# Altium PCB controller.PcbDoc (part 2 of 2)
Units mm, origin at the board's own origin, x right, y up, seen from the top; angles counter-clockwise.
Board outline 61.75 x 57 mm, 2 copper layers (Top Layer, Bottom Layer), stack 1.57 mm thick; 231 components, 171 nets, 622 pads, 230 vias.
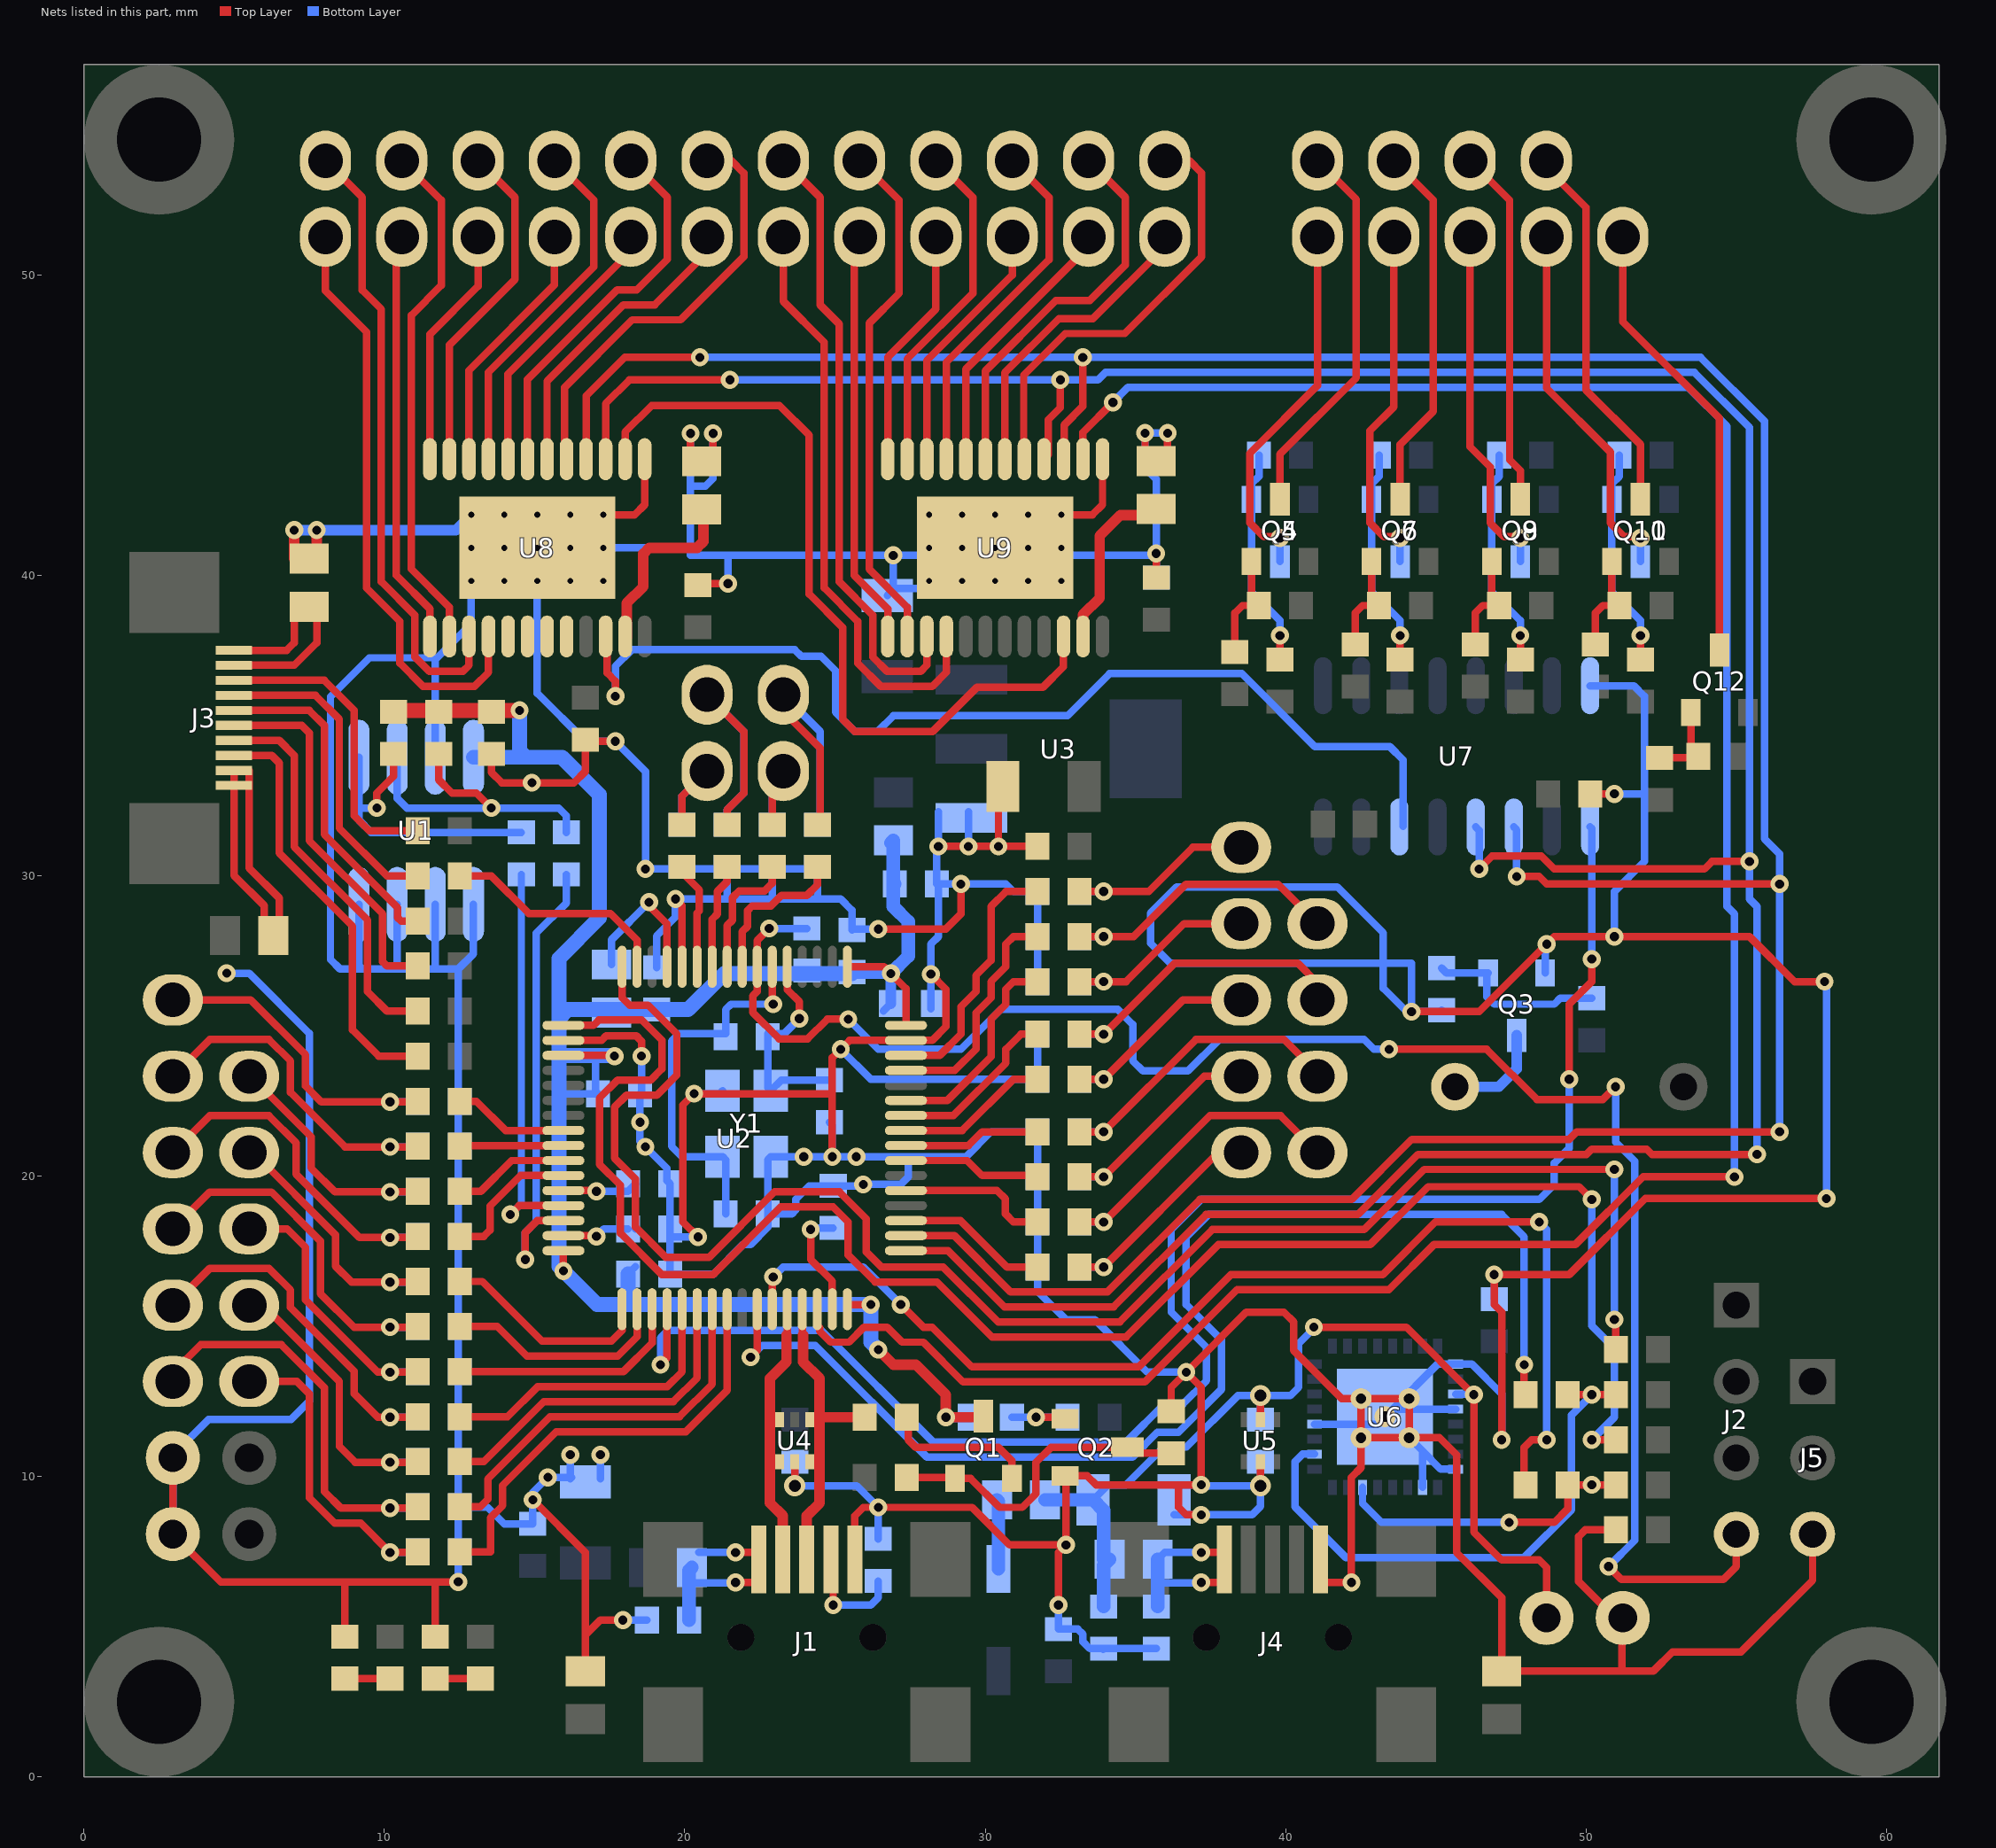
[diagram p2: the nets of this part, all layers, seen from the top]

## Via types
v1: diameter 0.6, hole 0.3, Top Layer to Bottom Layer, 196 vias
v2: diameter 0.5, hole 0.2, Top Layer to Bottom Layer, 30 vias
v3: diameter 0.7, hole 0.4, Top Layer to Bottom Layer, 4 vias

## Nets (pads, with @x,y where several pads share a name; then routed paths per layer and width w, separated by ;. In a path a pad name is that pad's centre, name@x,y a point inside that pad or via, vN(x,y) a via of type N, cw(c..) or ccw(c..) an arc to the next point about the centre after c; other vN are vias at no path point) (continued)
GND: C1.2 C2.1 C3.2 C4.2 C5.1 C6.1 C7.2 C8.2 C9.2 C10.2 C11.1 C12.2 C13.1 C14.2 C15.1 C16.2 C17.2 C18.2 C19.2 C20.2 C21.2 C22.2 C23.2 C24.2 C25.2 C26.2 C27.2 C28.2 C29.2 C30.2 C31.2 C32.2 C33.2 C34.2 C35.2 C36.2 C37.2 C38.2 C39.2 C40.2 C41.2 C42.2 C43.1 C44.2 C45.2 C46.2 C47.1 C48.2 C49.1 C50.2 C51.1 C52.1 J1.5 J4.5 J5.3 L4.1 L7.1 L9.1 Q2.2 Q3.2 R3.1 R5.2 R15.1 R16.1 R44.2 R46.2 R48.2 R74.1 R75.1 R76.1 Tp1.1 Tp5.1 Tp6.1 U1.1 U1.2 U1.3 U1.4 U1.7 U2.12 U2.18 U2.63 U3.1 U4.2 U5.2 U6.4 U6.17 U6.20 U6.24 U6.26 U6.GND_PAD U7.8 U8.1 U8.25 U9.1 U9.25 Y1.2 Y1.4 | length 492.9
  Top Layer w0.25: Tp5.1@3.01,10.62 Tp5.1@2.96,10.62 Tp6.1@2.96,8.08 4.55,6.49 8.69,6.49 ; R15.1@8.69,4.67 8.69,6.49 ; R16.1@11.69,4.67 11.69,6.49 ; v1(12.46,6.49) 11.69,6.49 ; C2.1@13.56,34.05 13.56,33.44 13.91,33.09 v1(14.91,33.09) 16.31,33.09 16.69,33.47 R74.1@16.69,34.52 16.74,34.47 v1(17.69,34.47) ; v1(14.94,9.22) 16.69,7.47 16.69,4.72 ; U2.18@15.96,24.515 17.23,24.515 17.38,24.665 18.385,24.665 18.56,24.49 v1(18.56,23.99) ; L4.1@16.69,3.52 16.69,4.72 ; v2(17.29,42.01) 18.33,42.01 18.665,42.345 U8.1@18.665,43.86 ; v1(17.94,5.22) 17.19,5.22 16.69,4.72 ; v1(19.69,29.22) 19.91,29 U2.12@19.91,26.965 ; R75.1@20.19,43.56 v1(20.19,44.72) ; C51.1@20.28,39.72 v1(21.44,39.72) ; v1(20.44,17.97) 19.94,18.47 19.94,22.37 v1(20.31,22.74) 24.89,22.74 24.91,22.72 ; R75.1@20.94,43.56 v1(20.94,44.72) ; v3(23.66,9.69) U4.2@23.66,10.49 ; v1(24.91,20.64) 24.91,22.72 ; J1.5@25.66,7.24 25.66,8.69 25.94,8.97 v1(26.44,8.97) 29.56,8.97 30.81,7.72 v1(32.69,7.72) ; v1(26.44,28.22) 28.69,28.22 29.19,28.72 v1(29.19,29.72) ; v1(28.19,26.72) 28.69,26.22 28.69,24.97 28.235,24.515 U2.63@27.36,24.515 25.485,24.515 v1(25.19,24.22) 24.91,23.94 24.91,22.72 ; v1(28.44,30.97) v1(29.44,30.97) v1(30.44,30.97) ; C14.2@30.59,32.97 30.44,32.82 v1(30.44,30.97) ; C15.1@31.74,30.97 v1(30.44,30.97) ; v1(32.44,5.72) 32.44,7.47 v1(32.69,7.72) ; v2(32.53,42.01) 33.57,42.01 33.905,42.345 U9.1@33.905,43.86 ; R76.1@35.32,43.57 v1(35.32,44.73) ; C52.1@35.69,39.91 v1(35.69,40.72) ; R76.1@36.07,43.57 v1(36.07,44.73) ; R44.2@36.19,12.17 36.19,12.97 v1(36.69,13.47) ; v1(37.19,8.72) 36.69,8.72 36.44,8.97 36.44,9.72 ; v3(39.16,9.69) U5.2@39.16,10.49 ; J4.5@41.16,7.24 41.16,6.47 v1(42.19,6.47) 42.19,9.97 42.51,10.29 U6.GND_PAD@42.51,11.29 ; v1(44.19,25.47) 46.44,25.47 v1(48.69,27.72) 48.94,27.97 v1(50.94,27.97) 55.44,27.97 56.94,26.47 v1(57.94,26.47) ; v1(47.19,11.22) 47.19,15.47 46.94,15.72 v1(46.94,16.72) 49.44,16.72 51.97,19.25 v1(58,19.25) ; C50.2@50.14,32.72 v1(50.94,32.72) ; Tp1.1@50.99,5.77 Tp1.1@51.19,5.57 ; R3.1@50.99,8.22 49.97,8.22 49.75,8 49.75,6.5 50.96,5.29 Tp1.1@51.19,5.29 ; Tp1.1@51.19,5.72 Tp1.1@51.19,5.57 ; Tp1.1@51.22,5.29 Tp1.1@51.19,5.29 ; Tp1.1@51.22,5.54 Tp1.1@51.19,5.57 ; J5.3@57.54,8.08 57.54,6.54 55.16,4.16 52.88,4.16 52.24,3.52 51.19,3.52 ; 8.69,6.49 11.69,6.49 ; v1(32.69,7.72) 32.69,9.982 Q2.2@32.652,10.02 33.39,10.02 33.69,9.72 36.44,9.72 ; 36.44,9.72 v1(37.19,9.72) 37.19,12.97 v1(36.69,13.47) ; v1(36.69,13.47) 38.69,15.47 39.94,15.47 40.265,15.145 40.265,14.19 41.865,12.59 U6.GND_PAD@42.51,12.59 ; U6.GND_PAD@42.51,11.29 U6.GND_PAD@42.51,12.59 ; U6.GND_PAD@42.51,11.29 U6.GND_PAD@44.11,11.29 ; U6.GND_PAD@42.51,12.59 U6.GND_PAD@44.11,12.59 U6.GND_PAD@44.11,11.29 ; U6.GND_PAD@44.11,11.29 45.12,11.29 45.69,10.72 45.69,7.47 47.19,5.97 L9.1@47.19,3.52 51.19,3.52 ; 51.19,3.52 Tp1.1@51.19,5.29 ; Tp1.1@51.19,5.29 Tp1.1@51.19,5.57
  Top Layer w0.35: L7.1@7,40.55 v1(7,41.5) ; L7.1@7.75,40.55 v1(7.75,41.5)
  Bottom Layer w0.25: Tp6.1@2.96,8.08 Tp5.1@2.96,10.62 2.96,10.71 4.145,11.895 6.895,11.895 7.5,12.5 7.5,24.75 5.5,26.75 v1(4.75,26.75) ; U1.4@9.155,29.04 9.155,26.995 9.26,26.89 ; U1.3@10.425,29.04 10.425,26.955 10.36,26.89 ; U1.2@11.695,29.04 11.695,26.955 11.76,26.89 ; U1.7@11.695,33.94 11.695,37.195 ; v1(12.46,6.49) C36.2@12.46,8.99 ; v2(12.89,42.01) v2(12.89,40.91) v2(12.89,39.81) 12.89,38.39 11.695,37.195 ; U1.1@12.965,29.04 12.965,27.395 12.46,26.89 ; v2@15.09,40.66 v2(15.09,39.81) 15.09,36.07 16.69,34.47 v1(17.69,34.47) 18.69,33.47 v1(18.69,30.22) C30.2@21.41,30.22 ; C40.2@16.19,9.92 C40.2@16.19,9.97 ; v1(16.19,10.72) C40.2@16.19,9.97 ; C40.2@16.24,9.97 C40.2@16.19,9.97 ; C40.2@17.19,9.92 v1(17.19,10.72) ; v2(17.29,40.91) 20.1,40.91 20.19,41 ; v1(17.94,5.22) C42.2@18.74,5.22 ; v1(18.56,23.99) 18.56,22.79 C8.2@18.51,22.74 v1(18.51,21.79) 18.51,21.15 v1(18.69,20.97) 19.406,20.254 19.406,19.844 R5.2@19.51,19.74 C6.1@19.51,18.24 C9.2@19.51,16.74 20.96,16.74 21.94,17.72 22.19,17.72 22.76,18.29 C3.2@22.76,18.74 ; C4.2@19.06,26.94 19.06,27.99 19.69,28.62 v1(19.69,29.22) 21.41,29.22 ; C6.1@19.64,17.97 v1(20.44,17.97) ; v1(20.19,44.72) 20.19,42.97 ; v1(20.31,22.74) 21.16,22.74 Y1.4@21.26,22.84 ; v1(20.94,44.72) 20.94,43.22 20.69,42.97 20.19,42.97 ; C30.2@21.41,30.29 C30.2@21.41,30.22 ; v1(21.44,39.72) 21.44,40.66 ; C29.2@22.91,30.29 C29.2@22.91,30.22 ; C43.1@23.66,10.49 v3(23.66,9.69) 25.72,9.69 v1(26.44,8.97) R46.2@26.44,7.92 ; C1.2@24.81,21.79 24.91,21.69 v1(24.91,20.64) ; v1(25.19,24.22) 26.19,23.22 C20.2@31.74,23.22 C21.2@31.74,24.72 ; v1@25.71,20.59 v1(25.71,20.64) ; v1(26.44,28.22) 25.59,28.22 C10.2@25.56,28.19 25.56,28.85 25.19,29.22 24.41,29.22 ; C12.2@26.74,39.32 C12.2@26.94,39.52 ; v2@28.13,39.56 26.98,39.56 C12.2@26.94,39.52 ; C7.2@28.19,25.56 v1(28.19,26.72) 28.19,27.72 28.44,27.97 28.44,29.67 C11.1@28.39,29.72 ; U3.1@28.44,32.13 v1(28.44,30.97) 28.39,30.92 C11.1@28.39,29.72 ; v1(29.44,30.97) U3.1@29.44,32.13 ; v1(30.44,30.97) U3.1@30.44,32.13 ; C22.2@31.74,26.47 C23.2@31.74,27.97 C24.2@31.74,29.47 30.94,29.47 30.69,29.72 v1(29.19,29.72) C11.1@28.39,29.72 ; v1(32.44,5.72) C47.1@32.44,4.92 33.08,4.92 33.25,4.75 33.25,4.5 33.48,4.27 C46.2@33.94,4.27 ; C46.2@33.92,4.25 C46.2@33.94,4.27 ; v1@35.5,40.66 v1(26.94,40.66) ; C45.2@35.69,4.27 C46.2@33.94,4.27 ; C13.1@35.69,39.92 v1@35.69,40.47 ; v1(35.69,40.72) 35.69,43.2 35.32,43.57 v1(35.32,44.73) v1(36.07,44.73) ; C44.2@36.29,8.72 v1(37.19,8.72) 38.88,8.72 39.16,9 C49.1@39.16,10.49 ; C44.2@36.29,9.72 v1(37.19,9.72) 37.22,9.69 v3(39.16,9.69) ; v1(36.69,13.47) 35.397,13.47 33.647,15.22 32.69,15.22 31.74,16.17 C38.2@31.74,16.97 C39.2@31.74,18.47 C18.2@31.74,19.97 C19.2@31.74,21.47 30.19,21.47 29.36,20.64 27.44,20.64 ; U6.4@40.96,11.74 43.06,11.74 U6.GND_PAD@43.31,11.99 U6.GND_PAD@43.56,12.24 ; v1@44,25.5 43.25,26.25 43.25,27.085 ; U6.GND_PAD@44.11,11.29 U6.GND_PAD@44.56,10.84 ; U6.26@44.56,9.64 U6.GND_PAD@44.56,10.84 ; R48.2@45.19,25.52 45.14,25.47 v1(44.19,25.47) 44.19,27.085 43.25,27.085 ; U6.24@45.66,10.24 45.16,10.24 U6.GND_PAD@44.56,10.84 ; U6.20@45.66,12.24 U6.GND_PAD@43.56,12.24 ; C48.2@46.94,15.92 v1(46.94,16.72) ; v1(47.19,11.22) 47.19,11.47 47.19,12.75 46.2,13.74 U6.17@45.66,13.74 45.06,13.74 U6.GND_PAD@43.56,12.24 ; Q3.2@48.64,26.758 48.64,27.67 v1(48.69,27.72) ; U7.8@50.135,36.32 51.59,36.32 51.94,35.97 51.94,32.72 ; v1(50.94,27.97) 50.94,29.47 51.94,30.47 51.94,32.72 ; v1(50.94,32.72) 51.94,32.72 ; v1(57.94,26.47) 58,26.41 v1(58,19.25) ; 9.26,26.89 8.52,26.89 8.205,27.205 8.205,35.955 9.5,37.25 11.64,37.25 11.695,37.195 ; 9.26,26.89 10.36,26.89 ; 10.36,26.89 11.76,26.89 ; 11.76,26.89 12.46,26.89 ; C36.2@12.46,8.99 12.46,11.99 12.46,14.99 12.46,20.99 12.46,26.89 ; C36.2@12.46,8.99 12.48,8.97 13.44,8.97 13.99,8.42 C41.2@14.94,8.42 ; C41.2@14.94,8.42 v1(14.94,9.22) ; C41.2@14.94,8.42 v1(14.94,9.22) ; v1(14.94,9.22) 14.94,9.47 v1(15.44,9.97) C40.2@16.19,9.97 ; 20.19,41 20.19,42.97 ; 20.19,41 20.19,40.66 21.44,40.66 ; 21.41,29.22 22.91,29.22 ; 21.41,29.22 C30.2@21.41,30.22 ; C30.2@21.41,30.22 C29.2@22.91,30.22 ; 21.44,40.66 v1(26.94,40.66) ; C3.2@22.76,18.74 23.56,18.74 23.69,18.87 23.69,19.22 24.14,19.67 C5.1@24.94,19.67 25.89,19.67 v1(25.94,19.72) 27.19,19.72 27.44,19.97 27.44,20.64 ; C3.2@22.76,18.74 22.76,20.54 Y1.2@22.86,20.64 v1(23.96,20.64) v1(24.91,20.64) ; 22.91,29.22 C29.2@22.91,30.22 ; 22.91,29.22 24.41,29.22 ; C29.2@22.91,30.22 24.34,30.22 C28.2@24.41,30.29 24.41,29.22 ; v1(24.91,20.64) v1(25.71,20.64) ; v1(25.71,20.64) 27.44,20.64 ; C12.2@26.94,39.52 v1(26.94,40.66) ; 43.25,27.085 43.25,28.092 41.717,29.625 36.375,29.625 35.5,28.75 35.5,27.75 36.165,27.085 43.25,27.085
  Bottom Layer w0.35: v1(7,41.5) v1(7.75,41.5) 12.38,41.5 v2(12.89,42.01)
  other v2: 13.99,39.81 16.19,39.81 17.29,39.81 28.13,39.81 29.23,39.81 30.33,39.81 31.43,39.81 32.53,39.81 13.99,40.91 15.09,40.91 16.19,40.91 28.13,40.91 29.23,40.91 30.33,40.91 31.43,40.91 32.53,40.91 13.99,42.01 15.09,42.01 16.19,42.01 28.13,42.01 29.23,42.01 30.33,42.01 31.43,42.01
LED_PLUS0: U8.17
LED_PLUS1: U8.18
LED_PLUS2: U8.19
LED_PLUS3: U8.20
NetBUZ1_2: BUZ1.2 Q3.3 | length 3.4
  Bottom Layer w0.35: BUZ1.2@45.64,22.97 47.1,22.97 47.69,23.56 Q3.3@47.69,24.682
NetC1_1: C1.1 R1.2 U2.5 Y1.1 | length 7.2
  Top Layer w0.25: U2.5@23.41,26.965 23.41,26.205 23.81,25.805 v1(23.81,25.24)
  Bottom Layer w0.25: v1(23.81,25.24) 23.31,24.74 22.76,24.74 R1.2@22.76,24.64 22.76,22.94 Y1.1@22.86,22.84 23.21,23.19 C1.1@24.81,23.19
NetC3_1: C3.1 R1.1 U2.6 Y1.3 | length 12.9
  Top Layer w0.25: U2.6@22.91,26.965 22.91,25.75 v1(22.94,25.72)
  Bottom Layer w0.25: C3.1@21.36,18.74 21.36,20.54 Y1.3@21.26,20.64 19.91,20.64 19.56,20.99 19.56,24.49 19.81,24.74 21.36,24.74 21.36,25.54 21.54,25.72 v1(22.94,25.72)
NetC5_2: C5.2 U2.47 | length 3.7
  Top Layer w0.25: v1(24.19,18.22) 24.19,17.22 24.91,16.5 U2.47@24.91,15.565
  Bottom Layer w0.25: v1(24.19,18.22) 24.24,18.27 C5.2@24.94,18.27
NetC6_2: C6.2 U2.31 | length 2.3
  Top Layer w0.25: U2.31@15.96,18.015 v1@17.085,18.015
  Bottom Layer w0.25: v1(17.06,17.99) 17.31,18.24 C6.2@18.11,18.24
NetC16_1: C16.1 R17.1 Tp8.1 | length 8.7
  Top Layer w0.25: Tp8.1@5.5,23.32 5.55,23.32 7.561,21.309 7.561,20.268 8.358,19.47 v1(10.19,19.47) R17.1@11.09,19.47
  Bottom Layer w0.25: v1(10.19,19.47) C16.1@11.09,19.47
NetC17_1: C17.1 R18.1 Tp9.1 | length 11.8
  Top Layer w0.25: Tp9.1@2.96,20.78 4.185,22.005 6.157,22.005 7.061,21.102 7.061,20.061 9.171,17.95 v1(10.19,17.95) R18.1@11.09,17.95
  Bottom Layer w0.25: v1(10.19,17.95) C17.1@11.09,17.95
NetC18_1: C18.1 R19.1 Tp10.1 | length 7.6
  Top Layer w0.25: R19.1@33.14,19.97 v1(33.94,19.97) 37.29,23.32 Tp10.1@38.52,23.32
  Bottom Layer w0.25: C18.1@33.14,19.97 v1(33.94,19.97)
NetC19_1: C19.1 R20.1 Tp11.1 | length 10.6
  Top Layer w0.25: R20.1@33.14,21.47 v1(33.94,21.47) 37.015,24.545 39.945,24.545 41.06,23.43 Tp11.1@41.06,23.32
  Bottom Layer w0.25: C19.1@33.14,21.47 v1(33.94,21.47)
NetC20_1: C20.1 R21.1 Tp12.1 | length 7.4
  Top Layer w0.25: R21.1@33.14,23.22 v1(33.94,23.22) 36.58,25.86 Tp12.1@38.52,25.86 Tp12.1@38.42,25.76
  Bottom Layer w0.25: C20.1@33.14,23.22 v1(33.94,23.22)
NetC21_1: C21.1 R22.1 Tp13.1 | length 10.6
  Top Layer w0.25: R22.1@33.14,24.635 R22.1@33.14,24.72 v1(33.94,24.72) 36.305,27.085 40.405,27.085 41.06,26.43 Tp13.1@41.06,25.86
  Bottom Layer w0.25: C21.1@33.14,24.72 v1(33.94,24.72)
NetC22_1: C22.1 R23.1 Tp14.1 | length 7
  Top Layer w0.25: R23.1@33.14,26.47 v1(33.94,26.47) 34.69,26.47 36.62,28.4 Tp14.1@38.52,28.4
  Bottom Layer w0.25: C22.1@33.14,26.47 v1(33.94,26.47)
NetC23_1: C23.1 R24.1 Tp15.1 | length 10
  Top Layer w0.25: R24.1@33.14,27.97 v1(33.94,27.97) 34.94,27.97 36.685,29.715 39.745,29.715 Tp15.1@41.06,28.4
  Bottom Layer w0.25: C23.1@33.14,27.97 v1(33.94,27.97)
NetC24_1: C24.1 R25.1 Tp16.1 | length 7.8
  Top Layer w0.25: R25.1@33.14,29.47 34.91,29.47 ; v1(33.94,29.47) 35.44,29.47 36.91,30.94 Tp16.1@38.52,30.94
  Bottom Layer w0.25: C24.1@33.14,29.47 v1(33.94,29.47)
NetC25_1: C25.1 R26.1 Tp17.1 | length 8.9
  Top Layer w0.25: Tp17.1@5.5,20.78 5.634,20.78 8.375,18.039 8.375,17 8.905,16.47 v1(10.19,16.47) R26.1@11.09,16.47
  Bottom Layer w0.25: v1(10.19,16.47) C25.1@11.09,16.47
NetC26_1: C26.1 R27.1 Tp18.1 | length 12.4
  Top Layer w0.25: Tp18.1@2.96,18.24 4.185,19.465 6.242,19.465 7.875,17.832 7.875,16.082 8.987,14.97 v1(10.19,14.97) R27.1@11.09,14.97
  Bottom Layer w0.25: v1(10.19,14.97) C26.1@11.09,14.97
NetC27_1: C27.1 R28.1 Tp19.1 | length 9.6
  Top Layer w0.25: Tp19.1@5.5,18.16 Tp19.1@5.5,18.24 6.76,18.24 7.375,17.625 7.375,15.875 9.78,13.47 v1(10.19,13.47) R28.1@11.09,13.47
  Bottom Layer w0.25: v1(10.19,13.47) C27.1@11.09,13.47
NetC28_1: C28.1 R29.1 Tp20.1 | length 9.8
  Top Layer w0.25: Tp20.1@23.28,36.02 23.28,35.47 24.505,34.245 24.505,31.785 R29.1@24.41,31.69
  Bottom Layer w0.25: Tp20.1@23.28,36.02 24.505,34.795 24.505,31.785 C28.1@24.41,31.69
NetC29_1: C29.1 R30.1 Tp21.1 | length 3.9
  Top Layer w0.25: R30.1@22.91,31.69 22.91,33.11 Tp21.1@23.28,33.48
  Bottom Layer w0.25: C29.1@22.91,31.69 22.91,33.11 Tp21.1@23.28,33.48
NetC30_1: C30.1 R31.1 Tp22.1 | length 10.1
  Top Layer w0.25: Tp22.1@20.74,36.02 21.965,34.795 21.965,32.745 21.41,32.19 R31.1@21.41,31.69
  Bottom Layer w0.25: Tp22.1@20.74,36.02 21.965,34.795 21.965,32.745 21.41,32.19 C30.1@21.41,31.69
NetC31_1: C31.1 R32.1 Tp23.1 | length 4.3
  Top Layer w0.25: R32.1@19.91,31.69 19.91,32.65 Tp23.1@20.74,33.48
  Bottom Layer w0.25: C31.1@19.91,31.69 19.91,32.65 Tp23.1@20.74,33.48
NetC32_1: C32.1 R33.1 Tp24.1 | length 11
  Top Layer w0.25: Tp24.1@2.96,25.86 5.55,25.86 7.375,24.035 7.375,22.992 7.897,22.47 v1(10.19,22.47) R33.1@11.09,22.47
  Bottom Layer w0.25: v1(10.19,22.47) C32.1@11.09,22.47
NetC33_1: C33.1 R34.1 Tp25.1 | length 11.6
  Top Layer w0.25: Tp25.1@2.96,23.32 4.185,24.545 ; 4.19,24.55 4.185,24.545 ; R34.1@11.09,20.97 v1(10.19,20.97) 8.69,20.97 6.875,22.785 6.875,23.827 6.157,24.545 4.185,24.545
  Bottom Layer w0.25: v1(10.19,20.97) C33.1@11.09,20.97
NetC34_1: C34.1 R35.1 Tp26.1 | length 12.4
  Top Layer w0.25: Tp26.1@2.96,15.7 4.185,16.925 6.157,16.925 6.875,16.207 6.875,15.625 9,13.5 9,12.75 9.78,11.97 v1(10.19,11.97) R35.1@11.09,11.97
  Bottom Layer w0.25: v1(10.19,11.97) C34.1@11.09,11.97
NetC35_1: C35.1 R36.1 Tp27.1 | length 10.1
  Top Layer w0.25: Tp27.1@5.65,15.55 Tp27.1@5.5,15.7 5.964,15.7 8.5,13.164 8.5,11 9.03,10.47 v1(10.19,10.47) R36.1@11.09,10.47
  Bottom Layer w0.25: v1(10.19,10.47) C35.1@11.09,10.47
NetC36_1: C36.1 R37.1 Tp28.1 | length 14
  Top Layer w0.25: Tp28.1@2.96,13.16 2.96,13.46 3.885,14.385 6.572,14.385 8,12.957 8,9.5 8.55,8.95 v1(10.19,8.95) R37.1@11.09,8.95
  Bottom Layer w0.25: v1(10.19,8.95) C36.1@11.09,8.95
NetC37_1: C37.1 R38.1 Tp29.1 | length 10.9
  Top Layer w0.25: Tp29.1@5.5,13.16 7.09,13.16 7.5,12.75 7.5,9.293 8.343,8.45 9.21,8.45 v1(10.19,7.47) R38.1@11.09,7.47
  Bottom Layer w0.25: v1(10.19,7.47) C37.1@11.09,7.47
NetC38_1: C38.1 R39.1 Tp30.1 | length 7.8
  Top Layer w0.25: R39.1@33.14,16.97 v1(33.94,16.97) 37.75,20.78 Tp30.1@38.52,20.78
  Bottom Layer w0.25: C38.1@33.14,16.97 v1(33.94,16.97)
NetC39_1: C39.1 R40.1 Tp31.1 | length 10.7
  Top Layer w0.25: R40.1@33.14,18.47 v1(33.94,18.47) 37.475,22.005 39.835,22.005 Tp31.1@41.06,20.78
  Bottom Layer w0.25: C39.1@33.14,18.47 v1(33.94,18.47)
NetC42_1: C42.1 J1.1 L3.2 | length 5.7
  Top Layer w0.25: v1(21.69,6.47) J1.1@22.44,6.47 ; v1(21.69,7.47) J1.1@22.44,7.47
  Bottom Layer w0.25: L3.2@20.24,6.455 v1@21.46,6.455 ; L3.2@20.47,7.47 v1(21.69,7.47)
  Bottom Layer w0.45: C42.1@20.14,5.22 20.14,6.87 L3.2@20.24,6.97
NetC45_1: C45.1 J4.1 L5.2 | length 5.9
  Top Layer w0.25: v1(37.19,6.47) 37.94,6.47 J4.1@37.96,6.49 ; v1(37.19,7.47) 37.94,7.47 J4.1@37.96,7.49
  Bottom Layer w0.25: 35.74,6.455 v1@36.96,6.455 ; L5.2@35.74,7.24 35.97,7.47 v1(37.19,7.47)
  Bottom Layer w0.45: C45.1@35.74,5.67 35.74,6.455 L5.2@35.74,7.24
NetD1_2: D1.2 R15.2 | length 1.5
  Top Layer w0.25: R15.2@8.69,3.27 D1.2@10.19,3.27
NetD2_2: D2.2 R16.2 | length 1.5
  Top Layer w0.25: R16.2@11.69,3.27 D2.2@13.19,3.27
NetD3_2: D3.2 L6.1 | length 2.3
  Bottom Layer w0.45: L6.1@30.39,9.22 30.44,9.17 D3.2@30.44,6.92
NetJ1_4: J1.4 R46.1 | length 3.7
  Top Layer w0.25: J1.4@24.86,7.24 24.94,7.16 v1(24.94,5.72)
  Bottom Layer w0.25: v1(24.94,5.72) 26.19,5.72 26.44,5.97 R46.1@26.44,6.52
NetJ3_1: J3.1 J3.2 L7.2 | length 7.7
  Top Layer w0.25: J3.2@4.99,37 7,37 7.75,37.75 L7.2@7.75,39 ; J3.1@4.99,37.5 6.75,37.5 7,37.75 L7.2@7,39
NetJ3_3: J3.3 R49.1 | length 10.3
  Top Layer w0.25: J3.3@4.99,36.5 8,36.5 9,35.5 9,31.99 9.5,31.49 R49.1@11.11,31.49
NetJ3_4: J3.4 R50.1 | length 10.7
  Top Layer w0.25: J3.4@4.99,36 7.707,36 8.5,35.207 8.5,31.578 10.088,29.99 R50.1@11.11,29.99
NetJ3_5: J3.5 R51.1 | length 11.3
  Top Layer w0.25: J3.5@4.99,35.5 7.5,35.5 8,35 8,31.371 10.44,28.931 10.44,28.603 10.553,28.49 R51.1@11.11,28.49
NetJ3_6: J3.6 R52.1 | length 12.5
  Top Layer w0.25: J3.6@4.99,35 7.25,35 7.5,34.75 7.5,31.164 9.94,28.724 9.94,27.133 10.083,26.99 R52.1@11.11,26.99
NetJ3_7: J3.7 R53.1 | length 13
  Top Layer w0.25: J3.7@4.99,34.5 6.5,34.5 7,34 7,30.957 9.44,28.517 9.44,26.133 10.083,25.49 R53.1@11.11,25.49
NetJ3_8: J3.8 R54.1 | length 14
  Top Layer w0.25: J3.8@4.99,34 6.25,34 6.5,33.75 6.5,30.75 8.94,28.31 8.94,24.86 9.81,23.99 R54.1@11.11,23.99
NetJ3_9: J3.9 J3.10 L8.2 | length 11.3
  Top Layer w0.25: J3.9@5,33.5 5,30 6,29 L8.2@6,28.25 ; J3.9@5.5,33.5 5.5,30.25 6.5,29.25 L8.2@6.5,28.25
NetL1_2: L1.2 U2.13 | length 5
  Top Layer w0.25: v1(18.81,29.115) 18.81,28.99 19.41,28.39 U2.13@19.41,26.965
  Bottom Layer w0.25: L1.2@17.56,27.04 17.56,27.865 v1(18.81,29.115)
NetQ1_1: Q1.1 Q2.3 R41.2 R44.1 | length 10.7
  Top Layer w0.25: R41.2@27.39,9.97 Q1.1@28.952,9.97 ; Q1.1@28.99,9.932 29.514,9.932 30.476,8.97 31.233,8.97 31.69,9.427 31.69,10.47 32.19,10.97 Q2.3@34.727,10.97 34.927,10.77 R44.1@36.19,10.77
  Top Layer w0.35: Q1.1@28.952,9.97 Q1.1@28.99,9.932
NetQ1_2: Q1.2 R45.1 | length 5.1
  Top Layer w0.25: R45.1@27.39,11.97 27.44,11.92 27.44,11.22 27.69,10.97 30.44,10.97 30.89,10.52 Q1.2@30.89,9.932
NetQ2_1: Q2.1 R42.2 R43.1 | length 2.8
  Top Layer w0.25: v1(31.69,11.97) 32.602,11.97 Q2.1@32.652,11.92
  Bottom Layer w0.25: R42.2@30.89,11.97 v1(31.69,11.97) R43.1@32.74,11.97
NetQ3_1: Q3.1 R47.1 R48.1 | length 6.1
  Bottom Layer w0.25: R48.1@45.19,26.92 45.352,26.758 Q3.1@46.74,26.758 46.69,26.708 46.69,25.97 46.94,25.72 48.94,25.72 49.14,25.92 R47.1@50.19,25.92
NetQ4_1: Q4.1 R55.2 R72.1 | length 3.8
  Top Layer w0.25: R72.1@38.31,37.44 38.31,38.49 38.31,38.74 38.56,38.99 R55.2@39.11,38.99 38.86,39.24 Q4.1@38.86,40.452
NetQ4_3: Q4.3 Tp32.1 | length 12.9
  Top Layer w0.25: Q4.3@39.81,42.527 39.81,44.03 42.35,46.57 42.35,52.51 Tp32.1@41.06,53.8
NetQ5_1: Q5.1 R56.2 R57.2 | length 7.3
  Top Layer w0.25: R56.2@39.81,37.19 v1(39.81,37.99)
  Bottom Layer w0.25: R57.2@39.11,43.99 39.11,43.29 38.86,43.04 Q5.1@38.86,42.527 38.86,39.44 39.81,38.49 v1(39.81,37.99)
NetQ5_3: Q5.3 Tp33.1 | length 12.6
  Top Layer w0.25: v1(39.81,41.24) 39.772,41.277 39.272,41.277 38.81,41.74 38.81,44.06 41.06,46.31 Tp33.1@41.06,51.26 Tp33.1@40.98,51.18
  Bottom Layer w0.25: Q5.3@39.81,40.452 v1(39.81,41.24)
NetQ6_1: Q6.1 R58.2 R59.2 | length 3.8
  Top Layer w0.25: R58.2@42.31,37.44 42.31,38.49 42.31,38.74 42.56,38.99 R59.2@43.11,38.99 42.86,39.24 Q6.1@42.86,40.452
NetQ6_3: Q6.3 Tp34.1 | length 12.3
  Top Layer w0.25: Tp34.1@43.6,53.8 44.915,52.485 44.915,45.455 43.81,44.35 Q6.3@43.81,42.527
NetQ7_1: Q7.1 R60.2 R61.2 | length 7.3
  Top Layer w0.25: R60.2@43.81,37.19 v1(43.81,37.99)
  Bottom Layer w0.25: R61.2@43.11,43.99 43.11,43.29 42.86,43.04 42.86,39.44 43.81,38.49 v1(43.81,37.99)
NetQ7_3: Q7.3 Tp35.1 | length 11.8
  Top Layer w0.25: Tp35.1@43.6,51.26 43.6,45.6 42.81,44.81 42.81,41.74 43.272,41.277 43.772,41.277 v1(43.81,41.24)
  Bottom Layer w0.25: Q7.3@43.81,40.452 v1(43.81,41.24)
NetQ8_1: Q8.1 R62.2 R63.2 | length 7.3
  Top Layer w0.25: R62.2@47.81,37.19 v1(47.81,37.99)
  Bottom Layer w0.25: R63.2@47.11,43.99 47.11,43.29 46.86,43.04 Q8.1@46.86,42.527 46.86,39.44 47.81,38.49 v1(47.81,37.99)
NetQ8_3: Q8.3 Tp36.1 | length 11.8
  Top Layer w0.25: Tp36.1@46.14,51.26 46.14,44.27 46.81,43.6 46.81,41.74 47.272,41.277 47.772,41.277 v1(47.81,41.24)
  Bottom Layer w0.25: Q8.3@47.81,40.452 v1(47.81,41.24)
NetQ9_1: Q9.1 R64.2 R65.2 | length 3.8
  Top Layer w0.25: R64.2@46.31,37.44 46.31,38.49 46.31,38.74 46.56,38.99 R65.2@47.11,38.99 46.86,39.24 Q9.1@46.86,40.452
NetQ9_3: Q9.3 Tp37.1 | length 12
  Top Layer w0.25: Tp37.1@46.14,53.8 47.455,52.485 47.455,48.25 47.455,43.84 47.81,43.485 Q9.3@47.81,42.527
NetQ10_1: Q10.1 R66.2 R67.2 | length 3.8
  Top Layer w0.25: R66.2@50.31,37.44 50.31,38.49 50.31,38.74 50.56,38.99 R67.2@51.11,38.99 50.86,39.24 Q10.1@50.86,40.452
NetQ10_3: Q10.3 Tp38.1 | length 12.6
  Top Layer w0.25: Tp38.1@48.68,53.8 48.68,53.56 49.995,52.245 49.995,48.25 49.995,46.165 51.81,44.35 Q10.3@51.81,42.527
NetQ11_1: Q11.1 R68.2 R69.2 | length 7.3
  Top Layer w0.25: R68.2@51.81,37.19 v1(51.81,37.99)
  Bottom Layer w0.25: R69.2@51.11,43.99 51.11,43.29 50.86,43.04 Q11.1@50.86,42.527 50.86,39.44 51.81,38.49 v1(51.81,37.99)
NetQ11_3: Q11.3 Tp39.1 | length 12.4
  Top Layer w0.25: Tp39.1@48.68,51.26 48.68,48.25 48.68,46.23 50.81,44.1 50.81,41.74 51.272,41.277 51.772,41.277 v1(51.81,41.24)
  Bottom Layer w0.25: Q11.3@51.81,40.452 v1(51.81,41.24)
NetQ12_1: Q12.1 R70.2 R71.2 | length 2.9
  Top Layer w0.25: R70.2@52.44,33.92 53.69,33.92 53.49,34.12 Q12.1@53.49,35.432 Q12.1@53.44,35.382
NetQ12_3: Q12.3 Tp40.1 | length 15.1
  Top Layer w0.25: Tp40.1@51.22,51.26 51.22,48.44 54.44,45.22 Q12.3@54.44,37.507
NetR4_1: R4.1 U2.16 | length 56
  Top Layer w0.25: U2.16@17.91,26.965 17.91,25.94 18.16,25.69 18.774,25.69 19.735,24.729 19.735,23.358 19.067,22.69 18.06,22.69 17.66,22.29 17.66,20.597 18.36,19.897 18.36,18.3 19.365,17.295 20.808,17.295 22.983,19.47 25.147,19.47 26.044,18.574 26.044,17.47 26.544,16.97 28.602,16.97 30.427,15.145 34.484,15.145 37.559,18.22 42.612,18.22 44.612,20.22 v1(50.94,20.22) ; v1(50.94,15.22) 50.99,15.17 R4.1@50.99,14.22
  Bottom Layer w0.25: v1(50.94,15.22) v1(50.94,20.22)
NetR5_1: R5.1 U2.28 | length 2.5
  Top Layer w0.25: U2.28@15.96,19.515 17.035,19.515 v1(17.06,19.49)
  Bottom Layer w0.25: v1(17.06,19.49) 18.11,19.49 R5.1@18.36,19.74
NetR6_1: R6.1 U2.17 | length 59.8
  Top Layer w0.25: U2.17@15.96,25.015 16.96,25.015 17.135,25.19 18.567,25.19 19.235,24.522 19.235,23.565 18.86,23.19 17.76,23.19 17.16,22.59 17.16,20.39 17.86,19.69 17.86,18.093 19.233,16.72 20.94,16.72 23.19,18.97 24.94,18.97 25.44,18.47 25.44,17.366 26.336,16.47 28.395,16.47 30.22,14.645 34.691,14.645 37.766,17.72 42.819,17.72 44.744,19.645 49.765,19.645 v1(50.19,19.22) ; v1(50.19,11.22) R6.1@50.99,11.22
  Bottom Layer w0.25: v1(50.19,11.22) 50.94,11.97 50.94,14.265 50.19,15.015 v1(50.19,19.22)
NetR13_2: R13.2 U2.29 | length 13.4
  Top Layer w0.25: v1(14.19,18.72) 14.485,19.015 U2.29@15.96,19.015
  Bottom Layer w0.25: v1(14.19,18.72) 14.56,19.09 R13.2@14.56,30.04
NetR14_2: R14.2 U2.30 | length 15.7
  Top Layer w0.25: v1(14.69,17.22) 14.69,18.12 15.085,18.515 U2.30@15.96,18.515
  Bottom Layer w0.25: v1(14.69,17.22) 14.69,18.12 15.06,18.49 15.06,28.09 16.06,29.09 R14.2@16.06,30.04
NetR75_2: R75.2 U8.23 | length 6.2
  Top Layer w0.35: U8.23@18.065,37.93 18.065,39.065 18.62,39.62 18.62,40.71 18.82,40.91 20.41,40.91 20.62,41.12 R75.2@20.62,42.19
NetR76_2: R76.2 U9.23 | length 5.8
  Top Layer w0.35: U9.23@33.255,37.96 33.255,38.685 33.81,39.24 33.81,41.31 34.5,42 35.49,42 R76.2@35.69,42.2
NetTp41_1: Tp41.1 U8.5 | length 14.4
  Top Layer w0.25: U8.5@16.065,43.86 16,43.925 16,46.25 18.25,48.5 19.862,48.5 21.965,50.603 21.965,53.385 21.55,53.8 Tp41.1@20.74,53.8
NetTp42_1: Tp42.1 U8.6 | length 10.3
  Top Layer w0.25: U8.6@15.415,43.86 15.415,46.458 17.957,49 19,49 20.74,50.74 Tp42.1@20.74,51.26 Tp42.1@20.82,51.26
NetTp43_1: Tp43.1 U8.7 | length 12.8
  Top Layer w0.25: U8.7@14.765,43.86 14.765,46.515 17.75,49.5 18.407,49.5 19.425,50.518 19.425,52.575 Tp43.1@18.2,53.8
NetTp44_1: Tp44.1 U8.8 | length 9.1
  Top Layer w0.25: U8.8@14.115,43.86 14.115,46.701 18.2,50.786 Tp44.1@18.2,51.26
NetTp45_1: Tp45.1 U8.9 | length 11.9
  Top Layer w0.25: U8.9@13.465,43.86 13.465,46.758 16.975,50.268 16.975,52.485 Tp45.1@15.66,53.8
NetTp46_1: Tp46.1 U8.10 | length 8.6
  Top Layer w0.25: U8.10@12.815,43.86 12.815,46.815 15.66,49.66 Tp46.1@15.66,51.26
NetTp47_1: Tp47.1 U8.11 | length 11.4
  Top Layer w0.25: U8.11@12.165,43.86 12.165,47.665 14.345,49.845 14.345,52.575 Tp47.1@13.12,53.8
NetTp48_1: Tp48.1 U8.12 | length 8.1
  Top Layer w0.25: U8.12@11.515,43.86 11.515,48.015 13.12,49.62 Tp48.1@13.12,51.26
NetTp49_1: Tp49.1 U8.13 | length 14.2
  Top Layer w0.25: Tp49.1@10.58,50.888 Tp49.1@10.58,51.26 10.4,51.08 10.4,39.993 11.515,38.878 U8.13@11.515,37.96
NetTp50_1: Tp50.1 U8.14 | length 17.3
  Top Layer w0.25: Tp50.1@10.58,53.8 11.895,52.485 11.895,49.645 10.9,48.65 10.9,40.2 12.165,38.935 U8.14@12.165,37.96
NetTp51_1: Tp51.1 U8.15 | length 20.8
  Top Layer w0.25: Tp51.1@8.04,53.8 9.265,52.575 9.265,49.485 9.9,48.85 9.9,39.786 11.015,38.671 11.015,37.278 11.493,36.8 12.615,36.8 12.815,37 U8.15@12.815,37.96
NetTp52_1: Tp52.1 U8.16 | length 19.9
  Top Layer w0.25: Tp52.1@8.04,51.26 8.04,49.46 9.4,48.1 9.4,39.579 10.515,38.464 10.515,37.071 11.286,36.3 13,36.3 13.465,36.765 U8.16@13.465,37.96
NetTp53_1: Tp53.1 U9.5 | length 14.5
  Top Layer w0.25: U9.5@31.305,43.86 31.28,43.885 31.28,46.659 32.664,48.043 34.645,48.043 37.205,50.603 37.205,53.385 36.79,53.8 Tp53.1@35.98,53.8
NetTp54_1: Tp54.1 U9.6 | length 10.3
  Top Layer w0.25: U9.6@30.655,43.86 30.655,46.741 32.457,48.543 33.589,48.543 35.98,50.934 Tp54.1@35.98,51.26 Tp54.1@36.06,51.26
NetTp55_1: Tp55.1 U9.7 | length 13
  Top Layer w0.25: U9.7@30.005,43.86 30.005,46.798 32.354,49.146 33.485,49.146 34.665,50.326 34.665,52.575 Tp55.1@33.44,53.8
NetTp56_1: Tp56.1 U9.8 | length 9.1
  Top Layer w0.25: U9.8@29.355,43.86 29.355,46.855 33.44,50.94 Tp56.1@33.44,51.26
NetTp57_1: Tp57.1 U9.9 | length 11.9
  Top Layer w0.25: U9.9@28.705,43.86 28.705,47.084 32.125,50.504 32.125,52.575 Tp57.1@30.9,53.8
NetTp58_1: Tp58.1 U9.10 | length 8.6
  Top Layer w0.25: U9.10@28.055,43.86 28.055,47.141 30.9,49.986 Tp58.1@30.9,51.26
NetTp59_1: Tp59.1 U9.11 | length 11.4
  Top Layer w0.25: U9.11@27.405,43.86 27.405,47.198 29.585,49.378 29.585,52.575 Tp59.1@28.36,53.8
NetTp60_1: Tp60.1 U9.12 | length 8.1
  Top Layer w0.25: U9.12@26.755,43.86 26.755,47.255 28.36,48.86 Tp60.1@28.36,51.26
NetTp61_1: Tp61.1 U9.13 | length 14.2
  Top Layer w0.25: Tp61.1@25.82,50.888 Tp61.1@25.82,51.26 25.64,51.08 25.64,39.993 26.755,38.878 U9.13@26.755,37.96
NetTp62_1: Tp62.1 U9.14 | length 17.3
  Top Layer w0.25: Tp62.1@25.82,53.8 27.135,52.485 27.135,49.385 26.14,48.39 26.14,40.2 27.405,38.935 U9.14@27.405,37.96
NetTp63_1: Tp63.1 U9.15 | length 20.8
  Top Layer w0.25: Tp63.1@23.28,53.8 24.505,52.575 24.505,48.995 25.14,48.36 25.14,39.786 26.255,38.671 26.255,37.278 26.733,36.8 27.855,36.8 28.055,37 U9.15@28.055,37.96
NetTp64_1: Tp64.1 U9.16 | length 19.9
  Top Layer w0.25: Tp64.1@23.28,51.26 23.28,49.11 24.64,47.75 24.64,39.579 25.755,38.464 25.755,37.071 26.526,36.3 28.24,36.3 28.705,36.765 U9.16@28.705,37.96
NetU7_14: U7.14 U8.22 | length 35.5
  Top Layer w0.25: U8.22@17.365,37.71 17.415,37.66 17.415,36.745 17.69,36.47 v1(17.69,35.97)
  Bottom Layer w0.25: v1(17.69,35.97) 17.69,36.97 18.24,37.52 23.662,37.52 23.887,37.295 24.54,37.295 25.015,36.82 25.015,35.44 25.66,34.795 26.415,34.795 26.94,35.32 32.74,35.32 34.14,36.72 38.545,36.72 40.97,34.295 43.465,34.295 43.905,33.855 U7.14@43.905,31.64
NetU8_2: U8.2 U9.22 | length 27.1
  Top Layer w0.25: U8.2@18.015,43.86 18.015,44.765 18.895,45.645 23.155,45.645 24.14,44.66 24.14,39.372 25.255,38.257 25.255,35.2 25.66,34.795 28.25,34.795 29.725,36.27 31.922,36.27 32.605,36.953 U9.22@32.605,37.96
PA1: R50.2 U2.15 | length 7.7
  Top Layer w0.25: R50.2@12.51,29.99 13.56,29.99 14.81,28.74 17.523,28.74 18.41,27.853 U2.15@18.41,26.965
PA9: R11.1 U2.42 | length 42.7
  Top Layer w0.25: v1(22.19,13.97) 22.41,14.19 U2.42@22.41,15.565 ; v1(47.94,13.72) 47.94,12.77 R11.1@47.99,12.72
  Bottom Layer w0.25: v1(22.19,13.97) 22.585,14.365 24.338,14.365 28.058,10.645 34.903,10.645 35.733,11.475 36.44,11.475 37.865,12.9 37.865,14.545 36.69,15.72 36.69,17.97 37.44,18.72 47.19,18.72 47.94,17.97 v1(47.94,13.72)
PA10: R12.1 U2.43 | length 39.6
  Top Layer w0.25: U2.43@22.91,15.565 22.91,16.61 v1(22.94,16.64) ; v1(27.19,15.72) 27.94,14.97 28.233,14.97 29.558,13.645 35.105,13.645 38.18,16.72 43.233,16.72 44.983,18.47 v1(48.44,18.47) ; R12.1@47.99,9.72 47.94,9.77 47.94,10.97 48.19,11.22 v1(48.69,11.22)
  Bottom Layer w0.25: v1(22.94,16.64) 23.27,16.97 25.94,16.97 v1(27.19,15.72) ; v1(48.44,18.47) 48.69,18.22 v1(48.69,11.22)
PA13: U2.46 U9.2 | length 83.7
  Top Layer w0.25: U2.46@24.41,15.565 24.41,15.018 24.485,14.943 24.485,14.839 24.854,14.47 25.466,14.47 25.966,14.97 26.733,14.97 27.233,14.47 27.94,14.47 29.265,13.145 35.312,13.145 38.387,16.22 43.44,16.22 44.94,17.72 49.645,17.72 51.895,19.97 v1(54.94,19.97) ; U9.2@33.255,43.86 33.255,44.755 v1(34.25,45.75)
  Bottom Layer w0.25: v1(34.25,45.75) 34.75,46.25 53.4,46.25 54.69,44.96 54.69,28.97 54.94,28.72 v1(54.94,19.97)
PA14: U2.49 U7.12 U8.3 U9.4 | length 110.5
  Top Layer w0.25: U8.3@17.365,43.86 17.365,45.71 18.155,46.5 v1(21.5,46.5) ; U2.49@27.36,17.515 28.764,17.515 30.634,15.645 34.277,15.645 37.352,18.72 42.404,18.72 44.404,20.72 50.015,20.72 50.19,20.895 52.015,20.895 52.19,20.72 v1(55.69,20.72) ; U9.4@31.955,43.86 32.105,44.01 32.105,45.182 32.5,45.577 v1(32.5,46.5) ; v1(46.44,30.22) 46.865,30.645 48.515,30.645 48.94,30.22 53.94,30.22 54.19,30.47 v1(55.44,30.47)
  Bottom Layer w0.25: v1(21.5,46.5) v1(32.5,46.5) 33.75,46.5 34,46.75 53.607,46.75 55.44,44.917 v1(55.44,30.47) 55.44,29.22 55.69,28.97 v1(55.69,20.72) ; U7.12@46.325,31.62 46.44,31.505 v1(46.44,30.22)
PA15: U2.50 U7.11 U8.4 U9.3 | length 112.9
  Top Layer w0.25: U8.4@16.715,43.86 16.715,45.965 18,47.25 v1(20.5,47.25) ; U2.50@27.36,18.015 28.971,18.015 30.841,16.145 34.07,16.145 37.145,19.22 42.197,19.22 44.197,21.22 49.44,21.22 49.69,21.47 v1(56.44,21.47) ; U9.3@32.605,43.86 32.63,43.885 32.63,45 33.25,45.62 v1(33.25,47.25) ; v1(47.69,29.97) 48.44,29.97 48.69,29.72 v1(56.44,29.72)
  Bottom Layer w0.25: v1(20.5,47.25) v1(33.25,47.25) 53.814,47.25 55.94,45.124 55.94,31.22 56.44,30.72 v1(56.44,29.72) v1(56.44,21.47) ; U7.11@47.595,31.62 47.69,31.525 v1(47.69,29.97)
PB0: R17.2 U2.26 | length 3.9
  Top Layer w0.25: R17.2@12.51,19.49 13.21,19.49 14.235,20.515 U2.26@15.96,20.515
PB1: R18.2 U2.27 | length 4.8
  Top Layer w0.25: R18.2@12.51,17.99 13.31,17.99 13.515,18.195 13.515,19 14.53,20.015 U2.27@15.96,20.015
PB3: R19.2 U2.55 | length 4.6
  Top Layer w0.25: U2.55@27.36,20.515 29.395,20.515 29.895,20.015 31.74,20.015 R19.2@31.74,19.97
PB4: R20.2 U2.56 | length 4.6
  Top Layer w0.25: U2.56@27.36,21.015 29.442,21.015 29.897,21.47 R20.2@31.74,21.47
PB5: R21.2 U2.57 | length 5.1
  Top Layer w0.25: U2.57@27.36,21.515 29.235,21.515 30.94,23.22 R21.2@31.74,23.22
PB6: R22.2 U2.58 | length 5.8
  Top Layer w0.25: U2.58@27.36,22.015 28.942,22.015 30.69,23.763 30.69,24.22 31.19,24.72 R22.2@31.74,24.72
PB7: R23.2 U2.59 | length 7.1
  Top Layer w0.25: U2.59@27.36,22.515 28.735,22.515 30.19,23.97 30.19,25.22 30.69,25.72 30.69,26.22 30.94,26.47 R23.2@31.74,26.47 R23.2@31.7,26.43
PB8: R24.2 U2.61 | length 7.7
  Top Layer w0.25: U2.61@27.36,23.515 28.985,23.515 29.69,24.22 29.69,25.427 30.19,25.927 30.19,26.47 30.69,26.97 30.69,27.72 30.94,27.97 R24.2@31.74,27.97
PB9: R25.2 U2.62 | length 8.5
  Top Layer w0.25: U2.62@27.36,24.015 28.485,24.015 29.19,24.72 29.19,25.634 29.69,26.134 29.69,26.677 30.19,27.177 30.19,28.97 30.69,29.47 R25.2@31.74,29.47
PB12: R26.2 U2.33 | length 7.1
  Top Layer w0.25: R26.2@12.51,16.49 13.26,16.49 15.25,14.5 17.556,14.5 17.91,14.854 U2.33@17.91,15.565
PB13: R27.2 U2.34 | length 7.5
  Top Layer w0.25: R27.2@12.51,14.99 13.76,14.99 14.75,14 17.763,14 18.41,14.647 U2.34@18.41,15.565
PB14: R28.2 U2.35 | length 7.9
  Top Layer w0.25: R28.2@12.51,13.49 17.96,13.49 18.91,14.44 U2.35@18.91,15.565
PB15: U2.36 U7.9 | length 54.8
  Top Layer w0.25: v1(19.19,13.72) 19.41,13.94 U2.36@19.41,15.565 ; v1(49.44,23.22) 49.44,25.72 50.19,26.47 v1(50.19,27.22)
  Bottom Layer w0.25: v1(19.19,13.72) 19.19,14.615 19.44,14.865 24.545,14.865 28.265,11.145 34.695,11.145 35.953,12.402 36.577,12.402 37.365,13.19 37.365,14.295 36.19,15.47 36.19,18.22 37.19,19.22 48.44,19.22 48.94,19.72 48.94,20.427 49.44,20.927 v1(49.44,23.22) ; U7.9@50.135,31.62 50.19,31.565 v1(50.19,27.22)
PC0: R29.2 U2.8 | length 5.2
  Top Layer w0.25: U2.8@21.91,26.965 21.91,28.133 22.085,28.308 22.085,28.835 22.24,28.99 22.867,28.99 23.219,29.341 24.061,29.341 24.41,29.69 R29.2@24.41,30.29
PC1: R30.2 U2.9 | length 4.4
  Top Layer w0.25: U2.9@21.41,26.965 21.41,28.34 21.585,28.515 21.585,29.265 21.81,29.49 22.66,29.49 22.91,29.74 R30.2@22.91,30.29
PC2: R31.2 U2.10 | length 3.5
  Top Layer w0.25: U2.10@20.91,26.965 20.91,28.547 21.085,28.722 21.085,29.472 21.41,29.797 R31.2@21.41,30.29
PC3: R32.2 U2.11 | length 3.6
  Top Layer w0.25: R32.2@19.91,30.29 19.91,30.095 20.485,29.52 20.485,28.829 20.41,28.754 U2.11@20.41,26.965
PC4: R33.2 U2.24 | length 3.9
  Top Layer w0.25: R33.2@12.51,22.49 13.06,22.49 14.035,21.515 U2.24@15.96,21.515
PC5: R34.2 U2.25 | length 3.5
  Top Layer w0.25: R34.2@12.51,20.99 12.51,21.015 U2.25@15.96,21.015
PC6: R35.2 U2.37 | length 10.1
  Top Layer w0.25: R35.2@12.51,11.99 14.103,11.99 15.103,12.99 19.415,12.99 19.91,13.485 U2.37@19.91,15.565
PC7: R36.2 U2.38 | length 11.3
  Top Layer w0.25: R36.2@12.51,10.49 13.31,10.49 15.31,12.49 19.622,12.49 20.41,13.278 U2.38@20.41,15.565
PC8: R37.2 U2.39 | length 13
  Top Layer w0.25: R37.2@12.51,8.99 13.19,8.99 13.44,9.24 13.44,9.913 15.517,11.99 19.829,11.99 20.91,13.071 U2.39@20.91,15.565
PC9: R38.2 U2.40 | length 14.9
  Top Layer w0.25: R38.2@12.51,7.49 13.534,7.49 13.534,8.626 13.94,9.033 13.94,9.706 15.724,11.49 20.036,11.49 21.41,12.864 U2.40@21.41,15.565
PC10: R39.2 U2.51 | length 5
  Top Layer w0.25: U2.51@27.36,18.515 29.178,18.515 30.723,16.97 R39.2@31.74,16.97
PC12: R40.2 U2.53 | length 5.1
  Top Layer w0.25: U2.53@27.36,19.515 30.395,19.515 30.668,19.242 30.668,18.742 30.94,18.47 R40.2@31.74,18.47
RESET: J2.4 R2.2 U2.7 | length 59.9
  Top Layer w0.25: v1(22.81,28.24) 22.41,27.84 U2.7@22.41,26.965 22.41,26.145 22.265,26 22.265,25.44 23.14,24.565 24.09,24.565 24.745,25.22 v1(25.44,25.22) ; v1(43.44,24.22) 46.69,24.22 48.365,22.545 50.558,22.545 v1(50.983,22.97) ; v1(50.75,7) 51.175,6.575 54.575,6.575 55,7 J2.4@55,8.08
  Bottom Layer w0.25: v1(22.81,28.24) R2.2@24.06,28.24 ; v1(25.44,25.22) 26.44,24.22 29.19,24.22 30.515,25.545 34.413,25.545 34.913,25.045 34.913,23.837 35.25,23.5 36.75,23.5 37.795,24.545 42.615,24.545 42.94,24.22 v1(43.44,24.22) ; v1(50.75,7) 51.615,7.865 51.615,20.5 50.983,21.132 v1(50.983,22.97)
RXD1: R10.2 R12.2 U6.30 | length 10.2
  Top Layer w0.25: v1(47.44,8.47) 48.94,8.47 49.39,8.92 R12.2@49.39,9.72 v1(50.19,9.72) R10.2@50.99,9.72
  Bottom Layer w0.25: U6.30@42.56,9.64 42.56,9.1 43.19,8.47 v1(47.44,8.47)
SCL: R8.1 R13.1 U1.5 | length 10.3
  Top Layer w0.25: v1(9.75,32.25) 9.75,32.75 10.31,33.31 R8.1@10.31,34.05
  Bottom Layer w0.25: U1.5@9.155,33.94 9.155,32.25 ; v1(9.75,32.25) 9.155,32.25 ; R13.1@14.56,31.44 9.56,31.44 9.155,31.845 9.155,32.25
SDA: R9.1 R14.1 U1.6 | length 10.8
  Top Layer w0.25: R9.1@11.81,34.05 11.81,33.19 12.25,32.75 13.06,32.75 v1(13.56,32.25)
  Bottom Layer w0.25: U1.6@10.425,33.94 10.425,32.575 10.75,32.25 v1(13.56,32.25) 15.8,32.25 16.06,31.99 R14.1@16.06,31.44
TXD1: R7.2 R11.2 U6.2 | length 18.5
  Top Layer w0.25: R11.2@49.39,12.72 v1(50.19,12.72) R7.2@50.99,12.72
  Bottom Layer w0.25: U6.2@40.96,10.74 40.56,10.74 40.31,10.49 40.31,8.99 42.005,7.295 47.927,7.295 49.515,8.883 49.515,12.045 v1(50.19,12.72)
USB_N: J1.2 U2.44 U4.1 U4.6 | length 8.7
  Top Layer w0.25: 23.385,14.715 23.41,14.74 U2.44@23.41,15.565
  Top Layer w0.35: J1.2@23.26,7.24 23.26,8.69 22.835,9.115 22.835,11.89 22.835,13.265 23.385,13.815 23.385,14.715
USB_P: J1.3 R45.2 U2.45 U4.3 U4.4 | length 10.2
  Top Layer w0.25: U2.45@23.91,15.565 23.91,14.74 23.935,14.715
  Top Layer w0.35: 23.935,14.715 23.935,13.815 24.485,13.265 24.485,11.97 ; J1.3@24.06,7.24 24.06,8.69 24.485,9.115 24.485,11.97 ; R45.2@25.99,11.97 24.485,11.97
VCC_USB: C44.1 C46.1 C49.2 L5.1 L6.2 Tp7.1 U5.5 U6.19 | length 33.4
  Top Layer w0.25: U5.5@39.16,11.89 v3(39.16,12.69) ; v1(40.94,14.97) 44.015,14.97 v1(46.265,12.72) 46.265,8.145 47.19,7.22 48.44,7.22 48.69,6.97 48.69,5.55 Tp7.1@48.68,5.54
  Bottom Layer w0.25: C44.1@33.59,9.22 34.09,9.72 34.685,9.72 35.94,10.975 36.695,10.975 38.41,12.69 v3(39.16,12.69) ; C49.2@39.16,11.89 v3(39.16,12.69) ; v1(40.94,14.97) 40.94,14.931 40.435,14.426 40.435,12.97 40.155,12.69 v3(39.16,12.69) ; U6.19@45.66,12.74 46.245,12.74 v1(46.265,12.72)
  Bottom Layer w0.45: L6.2@31.99,9.22 C44.1@33.59,9.22 33.94,8.87 L5.1@33.94,7.24 ; C46.1@33.94,5.67 33.94,7.04 L5.1@34.14,7.24
VDD: C2.2 C4.1 C7.1 C8.1 C9.1 C10.1 C11.2 L1.1 L2.2 Q1.3 R2.1 R8.2 R9.2 R42.1 U1.8 U2.1 U2.19 U2.32 U2.48 U2.64 | length 75.5
  Top Layer w0.25: v1(15.96,16.84) U2.32@15.96,17.515 ; U2.19@15.96,24.015 17.635,24.015 v1(17.66,23.99) ; U2.48@25.41,15.72 v1(26.19,15.72) ; U2.1@25.41,26.965 26.635,26.965 v1(26.86,26.74) 27.36,26.24 U2.64@27.36,25.015
  Top Layer w0.35: v1(26.44,14.22) 26.94,13.72 27.69,13.72 28.69,12.72 v1(28.69,11.97) 29.902,11.97 Q1.3@29.94,12.007
  Top Layer w0.5: R8.2@10.31,35.45 10.36,35.5 v1(14.5,35.5)
  Bottom Layer w0.25: 15.81,22.74 C8.1@17.11,22.74 17.035,22.815 17.035,24.015 ; C9.1@18.21,16.84 C9.1@18.36,16.99 ; C10.1@25.56,26.74 C10.1@25.56,26.79 ; C7.1@26.61,25.49 C7.1@26.86,25.74
  Bottom Layer w0.35: C10.1@25.56,26.79 25.61,26.74 v1(26.86,26.74) C7.1@26.86,25.74 ; v1(28.69,11.97) R42.1@29.49,11.97
  Bottom Layer w0.45: v1(26.86,26.74) 27.44,27.32 27.44,28.47 26.94,28.97 C11.2@26.94,29.77 ; L2.2@26.86,31.09 L2.2@26.94,31.17 C11.2@26.94,29.77 ; C11.2@26.99,29.72 C11.2@26.94,29.77
  Bottom Layer w0.5: U1.8@12.965,33.94 14.71,33.94 ; v1(14.5,35.5) 14.5,34.15 14.71,33.94 ; v1(17.66,23.99) 17.635,24.015 17.035,24.015 15.81,24.015 ; C9.1@18.11,16.74 18.11,15.72 ; C10.1@25.56,26.74 21.31,26.74 20.11,25.54 C4.1@19.06,25.54 16.11,25.54 15.81,25.24 ; v1(26.44,14.22) 26.19,14.47 v1(26.19,15.72) 18.11,15.72 ; 14.71,33.94 15.91,33.94 17.16,32.69 17.16,28.59 15.81,27.24 15.81,25.24 ; 15.81,24.015 15.81,22.74 15.81,16.99 v1(15.96,16.84) 17.08,15.72 18.11,15.72 ; 15.81,24.015 15.81,25.24
pads on no net: J1. J4. J4.4 U2.54 U6.3 U6.5 U6.6 U6.7 U6.8 U6.9 U6.10 U6.11 U6.12 U6.13 U6.18 U6.21 U6.22 U6.23 U6.25 U6.27 U6.28 U6.29 U6.31 U6.32 U9.17 U9.18 U9.19 U9.20

## Polygon pours and split planes (outlines as drawn)
GND on Top Layer "GND_L01_P-001" (solid, remove dead copper, pour order 12): 0.5,56.5 61.25,56.5 61.25,0.5 0.5,0.5
FRAME_SHLD on Top Layer "Frame_shld" (solid, remove dead copper, pour order 11): 0.5,56.5 0.5,0.5 61.25,0.5 61.25,5 61.25,5.25 60.5,5.25 60.5,1.25 59.75,1.25 1.25,1.25 1.25,6 1.25,55.75 60.5,55.75 60.5,5.25 61.5,5.25 61.25,5.25 61.25,56.5 0.5,56.5
GND on Bottom Layer "gnd" (solid, remove dead copper, pour order 9): 0.5,56.5 61.25,56.5 61.25,0.5 0.5,0.5
FRAME_SHLD on Bottom Layer "Frame_shld" (solid, remove dead copper, pour order 14): 0.5,56.5 0.5,0.5 61.25,0.5 61.25,5 61.25,5.25 60.5,5.25 60.5,1.25 59.75,1.25 1.25,1.25 1.25,6 1.25,55.75 60.5,55.75 60.5,5.25 61.5,5.25 61.25,5.25 61.25,56.5 0.5,56.5

## Silkscreen, mask and mechanical layers (free items; w line width, h text height)
Outline:
  the board outline again, w0.25
Drawing:
  text "Mechanical Characteristics" at 117.06,-25.637 h5
Assembly_top:
  text "Assembly TOP" at 117.06,-25.51 h5
Assembly_bot:
  text "Assembly Bottom" at -34.94,-25.71 h5
Note_top:
  text "Note TOP" at 117.06,-25.51 h5
Note_bot:
  text "Note Bottom" at -34.94,-25.715 h5
PCB_Note:
  lines w0.25: 140.06,25.49 171.06,25.49 ; 148.06,-8.01 148.06,-5.01 148.06,-2.01 148.06,0.99 148.06,3.99 148.06,6.99 148.06,9.99 148.06,12.99 148.06,15.99 148.06,18.99 148.06,21.99 148.06,24.99 ; 171.06,-5.01 140.06,-5.01 ; 171.06,-2.01 140.06,-2.01 ; 171.06,0.99 140.06,0.99 ; 171.06,3.99 140.06,3.99 ; 171.06,6.99 140.06,6.99 ; 171.06,9.99 140.06,9.99 ; 171.06,12.99 140.06,12.99 ; 171.06,15.99 140.06,15.99 ; 171.06,18.99 140.06,18.99 ; 171.06,21.99 140.06,21.99 ; 140.06,-5.01 140.06,-8.01 171.06,-8.01 171.06,24.99 ; 140.06,-5.01 140.06,-2.01 ; 140.06,-2.01 140.06,0.99 ; 140.06,0.99 140.06,3.99 ; 140.06,3.99 140.06,6.99 ; 140.06,6.99 140.06,9.99 ; 140.06,9.99 140.06,12.99 ; 140.06,12.99 140.06,15.99 ; 140.06,15.99 140.06,18.99 ; 140.06,18.99 140.06,21.99 ; 140.06,21.99 140.06,24.99 ; 140.06,24.99 140.06,28.99 171.06,28.99 171.06,24.99 ; 140.06,24.99 171.06,24.99
  lines w0.3: 116.56,-38.51 116.56,-26.51 ; 116.56,-35.51 184.06,-35.51 ; 116.56,-32.51 184.06,-32.51 ; 116.56,-29.51 184.06,-29.51 ; 132.56,-38.51 132.56,-26.51 ; 174.06,-38.51 174.06,-35.51 ; 184.06,-26.51 132.56,-26.51 ; 184.06,-21.51 116.56,-21.51 116.56,-26.51 ; 116.56,-26.51 132.56,-26.51
  lines w0.35: -105.94,-43.51 189.06,-43.51 189.06,166.49 -105.94,166.49 -105.94,-43.51 ; -100.94,-38.51 184.06,-38.51 184.06,161.49 -100.94,161.49 -100.94,-38.51
  text "- Plugged Vias" at 137.56,34.74 h5
  text "File Layer names:" at 140.56,26.49 h3.5
  text "GTO" at 140.56,22.49 h3
  text "Top Overlay" at 149.56,22.49 h3
  text "GTP" at 140.56,19.49 h3
  text "Top Paste" at 149.56,19.49 h3
  text "GTS" at 140.56,16.49 h3
  text "Top Solder" at 149.56,16.49 h3
  text "GTL" at 140.56,13.49 h3
  text "Top Layer" at 149.56,13.49 h3
  text "GBL" at 140.56,10.49 h3
  text "Bottom Layer" at 149.56,10.49 h3
  text "GBS" at 140.56,7.49 h3
  text "Bottom Solder" at 149.56,7.49 h3
  text "GBP" at 140.56,4.49 h3
  text "Bottom Paste" at 149.56,4.49 h3
  text "GBO" at 140.56,1.49 h3
  text "Bottom Overlay" at 149.56,1.49 h3
  text "GM1" at 140.56,-4.51 h3
  text "Outline" at 149.56,-4.51 h3
  text "GM7" at 140.56,-7.51 h3
  text "PCB_Note" at 149.56,-7.51 h3
  text "PCB Note" at 117.06,-25.51 h5
  text "Board Name" at 117.56,-29.01 h3
  text "Board Name" at 133.56,-29.01 h3
  text "Author" at 117.56,-32.01 h3
  text "Daniele Basile <asterix@develer.com>" at 133.56,-32.01 h3
  text "Date" at 117.56,-35.01 h3
  text ".print_date" at 133.56,-35.01 h3
  text "Revision" at 117.56,-38.01 h3
  text "A" at 133.56,-38.01 h3
  text "A3" at 176.06,-38.01 h3
TitleBlock_top:
  lines w0.3: 116.56,-38.51 116.56,-26.51 ; 116.56,-35.51 184.06,-35.51 ; 116.56,-32.51 184.06,-32.51 ; 116.56,-29.51 184.06,-29.51 ; 132.56,-38.51 132.56,-26.51 ; 174.06,-38.51 174.06,-35.51 ; 184.06,-26.51 132.56,-26.51 ; 184.06,-21.51 116.56,-21.51 116.56,-26.51 ; 116.56,-26.51 132.56,-26.51
  lines w0.35: -105.94,-43.51 189.06,-43.51 189.06,166.49 -105.94,166.49 -105.94,-43.51 ; -100.94,-38.51 184.06,-38.51 184.06,161.49 -100.94,161.49 -100.94,-38.51
  text "Board Name" at 117.56,-29.01 h3
  text "Board Name" at 133.56,-29.01 h3
  text "Author" at 117.56,-32.01 h3
  text "Daniele Basile <asterix@develer.com>" at 133.56,-32.01 h3
  text "Date" at 117.56,-35.01 h3
  text ".print_date" at 133.56,-35.01 h3
  text "Revision" at 117.56,-38.01 h3
  text "A" at 133.56,-38.01 h3
  text "A3" at 176.06,-38.01 h3
TitleBlock_bot:
  lines w0.3: -100.94,-35.51 -33.44,-35.51 ; -100.94,-32.51 -33.44,-32.51 ; -100.94,-29.51 -33.44,-29.51 ; -100.94,-26.51 -49.44,-26.51 ; -100.94,-21.51 -33.44,-21.51 -33.44,-26.51 ; -90.94,-38.51 -90.94,-35.51 ; -49.44,-38.51 -49.44,-26.51 ; -33.44,-38.51 -33.44,-26.51 ; -49.44,-26.51 -33.44,-26.51
  lines w0.35: -105.94,-43.51 189.06,-43.51 189.06,166.49 -105.94,166.49 -105.94,-43.51 ; -100.94,-38.51 184.06,-38.51 184.06,161.49 -100.94,161.49 -100.94,-38.51
  text "Board Name" at -50.44,-29.01 h3
  text "Board Name" at -34.44,-29.01 h3
  text "Daniele Basile <asterix@develer.com>" at -50.44,-32.01 h3
  text "Author" at -34.44,-32.01 h3
  text ".print_date" at -50.44,-35.01 h3
  text "Date" at -34.44,-35.01 h3
  text "A3" at -92.94,-38.01 h3
  text "A" at -50.44,-38.01 h3
  text "Revision" at -34.44,-38.01 h3

## Text inside footprints (layer, text, board x,y; h text height)
D1: Assembly_top "K" at 10.39,3.095 h0.5 r270
D2: Assembly_top "K" at 13.39,3.095 h0.5 r270
J3: Top Overlay "10" at 4.771,32.456 h0.9 r270; Top Overlay "1" at 4.771,38.425 h0.9 r270
J5: Top Overlay "1" at 57.27,15.37 h1.5 r270; Top Overlay "3" at 57.032,6.448 h1.5 r270
U3: Note_bot "1" at 28.44,32.72 h1 r180
U7: Note_bot "1" at 41.39,35.17 h1 r90